# EAGLE board untitled (EAGLE 9.6.2)
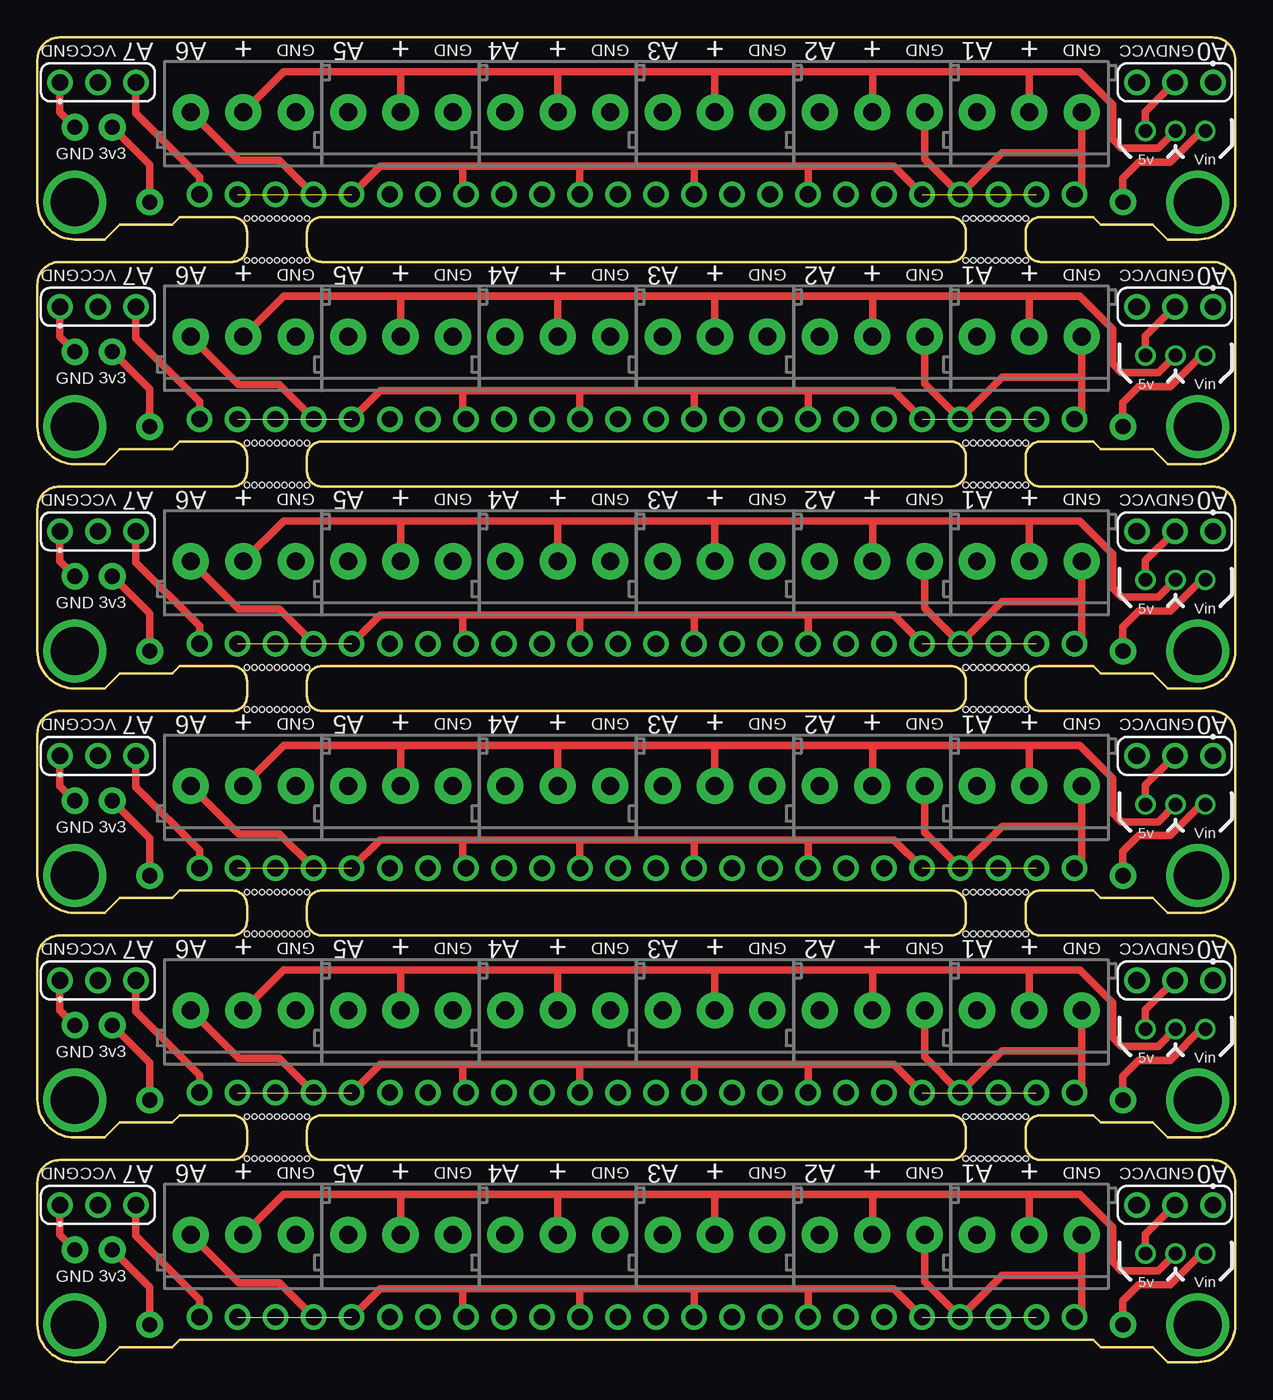
[diagram p0: board, top side]
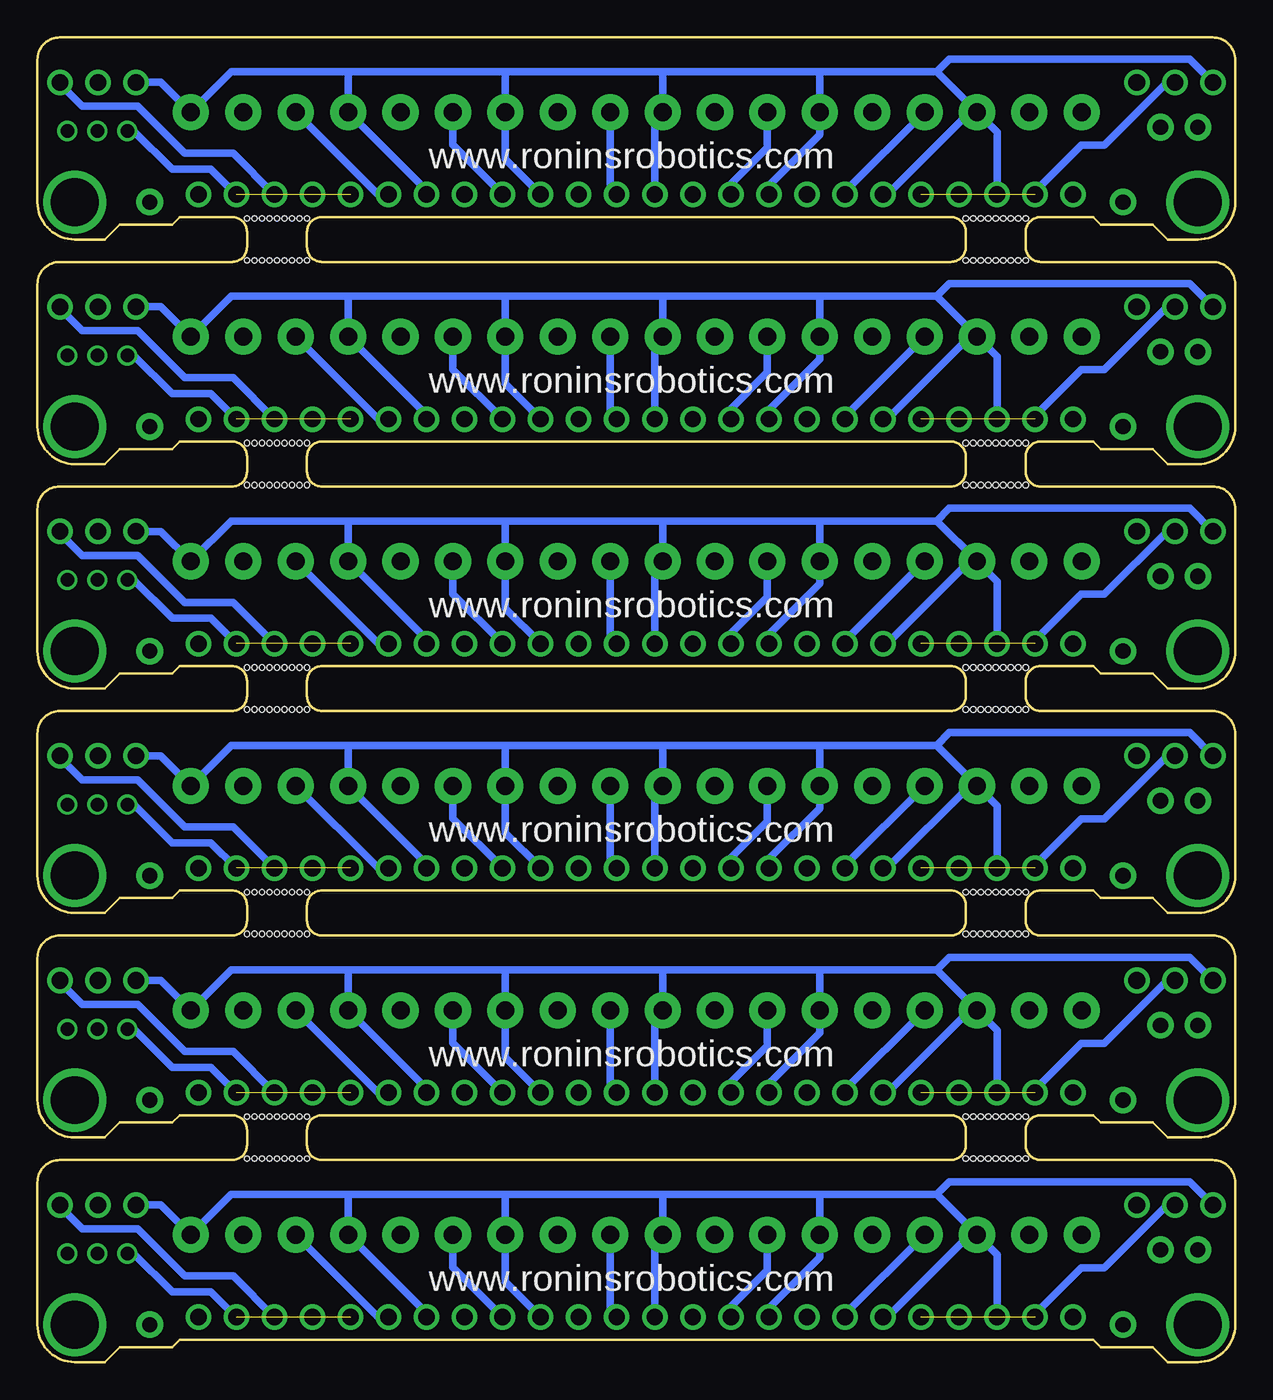
[diagram p1: board, bottom side, seen from below]

Size 80 x 88.5 mm. Coordinates in mm from the lower left corner, seen from the top.
Outline: 0,12 0,2.5 arc90 2.5,0 4.5,0 5.5,1 9,1 9.5,1.5 70.5,1.5 71,1 74.5,1 75.5,0 77.5,0 arc90 80,2.5 80,12 arc90 78.5,13.5 67,13.5 arc-90 66,14.5 66,15.5 arc-90 67,16.5 70.5,16.5 71,16 74.5,16 75.5,15 77.5,15 arc90 80,17.5 80,27 arc90 78.5,28.5 67,28.5 arc-90 66,29.5 66,30.5 arc-90 67,31.5 70.5,31.5 71,31 74.5,31 75.5,30 77.5,30 arc90 80,32.5 80,42 arc90 78.5,43.5 67,43.5 arc-90 66,44.5 66,45.5 arc-90 67,46.5 70.5,46.5 71,46 74.5,46 75.5,45 77.5,45 arc90 80,47.5 80,57 arc90 78.5,58.5 67,58.5 arc-90 66,59.5 66,60.5 arc-90 67,61.5 70.5,61.5 71,61 74.5,61 75.5,60 77.5,60 arc90 80,62.5 80,72 arc90 78.5,73.5 67,73.5 arc-90 66,74.5 66,75.5 arc-90 67,76.5 70.5,76.5 71,76 74.5,76 75.5,75 77.5,75 arc90 80,77.5 80,87 arc90 78.5,88.5 1.5,88.5 arc90 0,87 0,77.5 arc90 2.5,75 4.5,75 5.5,76 9,76 9.5,76.5 13,76.5 arc-90 14,75.5 14,74.5 arc-90 13,73.5 1.5,73.5 arc90 0,72 0,62.5 arc90 2.5,60 4.5,60 5.5,61 9,61 9.5,61.5 13,61.5 arc-90 14,60.5 14,59.5 arc-90 13,58.5 1.5,58.5 arc90 0,57 0,47.5 arc90 2.5,45 4.5,45 5.5,46 9,46 9.5,46.5 13,46.5 arc-90 14,45.5 14,44.5 arc-90 13,43.5 1.5,43.5 arc90 0,42 0,32.5 arc90 2.5,30 4.5,30 5.5,31 9,31 9.5,31.5 13,31.5 arc-90 14,30.5 14,29.5 arc-90 13,28.5 1.5,28.5 arc90 0,27 0,17.5 arc90 2.5,15 4.5,15 5.5,16 9,16 9.5,16.5 13,16.5 arc-90 14,15.5 14,14.5 arc-90 13,13.5 1.5,13.5 arc90 0,12
Outline: 19,16.5 arc90 18,15.5 18,14.5 arc90 19,13.5 61,13.5 arc90 62,14.5 62,15.5 arc90 61,16.5 19,16.5
Outline: 19,31.5 arc90 18,30.5 18,29.5 arc90 19,28.5 61,28.5 arc90 62,29.5 62,30.5 arc90 61,31.5 19,31.5
Outline: 19,61.5 arc90 18,60.5 18,59.5 arc90 19,58.5 61,58.5 arc90 62,59.5 62,60.5 arc90 61,61.5 19,61.5
Outline: 19,76.5 arc90 18,75.5 18,74.5 arc90 19,73.5 61,73.5 arc90 62,74.5 62,75.5 arc90 61,76.5 19,76.5
Outline: 19,46.5 arc90 18,45.5 18,44.5 arc90 19,43.5 61,43.5 arc90 62,44.5 62,45.5 arc90 61,46.5 19,46.5
Copper layers (1*16): Top 0.035mm / dielectric 1.6mm / Bottom 0.035mm
Design rules "Elecrow_2-layer_PCB_eagle_rule": minimum track width 6mil, minimum drill 12mil, track to track 6mil, track to pad 6mil, pad to pad 6mil, via to via 8mil, smd to smd 0mil, copper to edge 20mil, drill to drill 10mil, minimum pad ring 6mil, minimum via ring 6mil, stop-mask expansion 0mil, vias tented up to drill 100mil, thermal gap 10mil
Holes 0.35 mm at 14,16.4 14.5,16.4 15,16.4 15.5,16.4 16,16.4 16.5,16.4 17,16.4 17.5,16.4 18,16.4 14,13.6 14.5,13.6 15,13.6 15.5,13.6 16,13.6 16.5,13.6 17,13.6 17.5,13.6 18,13.6 62,16.4 62.5,16.4 63,16.4 63.5,16.4 64,16.4 64.5,16.4 65,16.4 65.5,16.4 66,16.4 62,13.6 62.5,13.6 63,13.6 63.5,13.6 64,13.6 64.5,13.6 65,13.6 65.5,13.6 66,13.6 14,31.4 14.5,31.4 15,31.4 15.5,31.4 16,31.4 16.5,31.4 17,31.4 17.5,31.4 18,31.4 14,28.6 14.5,28.6 15,28.6 15.5,28.6 16,28.6 16.5,28.6 17,28.6 17.5,28.6 18,28.6 62,31.4 62.5,31.4 63,31.4 63.5,31.4 64,31.4 64.5,31.4 65,31.4 65.5,31.4 66,31.4 62,28.6 62.5,28.6 63,28.6 63.5,28.6 64,28.6 64.5,28.6 65,28.6 65.5,28.6 66,28.6 14,61.4 14.5,61.4 15,61.4 15.5,61.4 16,61.4 16.5,61.4 17,61.4 17.5,61.4 18,61.4 14,58.6 14.5,58.6 15,58.6 15.5,58.6 16,58.6 16.5,58.6 17,58.6 17.5,58.6 18,58.6 62,61.4 62.5,61.4 63,61.4 63.5,61.4 64,61.4 64.5,61.4 65,61.4 65.5,61.4 66,61.4 62,58.6 62.5,58.6 63,58.6 63.5,58.6 64,58.6 64.5,58.6 65,58.6 65.5,58.6 66,58.6 14,76.4 14.5,76.4 15,76.4 15.5,76.4 16,76.4 16.5,76.4 17,76.4 17.5,76.4 18,76.4 14,73.6 14.5,73.6 15,73.6 15.5,73.6 16,73.6 16.5,73.6 17,73.6 17.5,73.6 18,73.6 62,76.4 62.5,76.4 63,76.4 63.5,76.4 64,76.4 64.5,76.4 65,76.4 65.5,76.4 66,76.4 62,73.6 62.5,73.6 63,73.6 63.5,73.6 64,73.6 64.5,73.6 65,73.6 65.5,73.6 66,73.6 14,46.4 14.5,46.4 15,46.4 15.5,46.4 16,46.4 16.5,46.4 17,46.4 17.5,46.4 18,46.4 14,43.6 14.5,43.6 15,43.6 15.5,43.6 16,43.6 16.5,43.6 17,43.6 17.5,43.6 18,43.6 62,46.4 62.5,46.4 63,46.4 63.5,46.4 64,46.4 64.5,46.4 65,46.4 65.5,46.4 66,46.4 62,43.6 62.5,43.6 63,43.6 63.5,43.6 64,43.6 64.5,43.6 65,43.6 65.5,43.6 66,43.6

## Footprints (pad centres in the part's own frame; a part is rotated, then mirrored left to right if it is on the bottom)
SCREWTERMINAL-3.5MM-3-NS = drill 1.2 pad 2.413: 1 0,0; 2 3.5,0; 3 7,0
1X01-CLEANBIG = drill 1.016 pad 1.778: 1 0,0
HDRVR3W64P254_1X3_762X240X800B = drill 1.105 pad 1.705: 1 0,0; 2 2.54,0; 3 5.08,0
1X3_2MM = drill 0.9 pad 1.32: P$1 0,0; P$2 2,0; P$3 4,0
1X24DFR = drill 1.092 pad 1.702: P$1 0,0; P$2 2.54,0; P$3 5.08,0; P$4 7.62,0; P$5 10.16,0; P$6 12.7,0; P$7 15.24,0; P$8 17.78,0; P$9 20.32,0; P$10 22.86,0; P$11 25.4,0; P$12 27.94,0; P$13 30.48,0; P$14 33.02,0; P$15 35.56,0; P$16 38.1,0; P$17 40.64,0; P$18 43.18,0; P$19 45.72,0; P$20 48.26,0; P$21 50.8,0; P$22 53.34,0; P$23 55.88,0; P$24 58.42,0

## Placement (x,y rotation side)
J1  [SCREWTERMINAL-3.5MM-3-NS]  10.25,23.5 0 top
J2  [SCREWTERMINAL-3.5MM-3-NS]  20.75,23.5 0 top
J3  [SCREWTERMINAL-3.5MM-3-NS]  31.25,23.5 0 top
J4  [SCREWTERMINAL-3.5MM-3-NS]  41.75,23.5 0 top
J5  [SCREWTERMINAL-3.5MM-3-NS]  52.25,23.5 0 top
J6  [SCREWTERMINAL-3.5MM-3-NS]  10.25,8.5 0 top
J7  [SCREWTERMINAL-3.5MM-3-NS]  20.75,8.5 0 top
J8  [SCREWTERMINAL-3.5MM-3-NS]  31.25,8.5 0 top
J9  [SCREWTERMINAL-3.5MM-3-NS]  41.75,8.5 0 top
J10  [SCREWTERMINAL-3.5MM-3-NS]  52.25,8.5 0 top
J11  [SCREWTERMINAL-3.5MM-3-NS]  62.75,8.5 0 top
J12  [SCREWTERMINAL-3.5MM-3-NS]  62.75,23.5 0 top
J13  [SCREWTERMINAL-3.5MM-3-NS]  10.25,38.5 0 top
J14  [SCREWTERMINAL-3.5MM-3-NS]  20.75,38.5 0 top
J15  [SCREWTERMINAL-3.5MM-3-NS]  31.25,38.5 0 top
J16  [SCREWTERMINAL-3.5MM-3-NS]  41.75,38.5 0 top
J17  [SCREWTERMINAL-3.5MM-3-NS]  52.25,38.5 0 top
J18  [SCREWTERMINAL-3.5MM-3-NS]  62.75,38.5 0 top
J19  [SCREWTERMINAL-3.5MM-3-NS]  10.25,53.5 0 top
J20  [SCREWTERMINAL-3.5MM-3-NS]  20.75,53.5 0 top
J21  [SCREWTERMINAL-3.5MM-3-NS]  31.25,53.5 0 top
J22  [SCREWTERMINAL-3.5MM-3-NS]  41.75,53.5 0 top
J23  [SCREWTERMINAL-3.5MM-3-NS]  52.25,53.5 0 top
J24  [SCREWTERMINAL-3.5MM-3-NS]  62.75,53.5 0 top
J25  [SCREWTERMINAL-3.5MM-3-NS]  10.25,68.5 0 top
J26  [SCREWTERMINAL-3.5MM-3-NS]  20.75,68.5 0 top
J27  [SCREWTERMINAL-3.5MM-3-NS]  31.25,68.5 0 top
J28  [SCREWTERMINAL-3.5MM-3-NS]  41.75,68.5 0 top
J29  [SCREWTERMINAL-3.5MM-3-NS]  52.25,68.5 0 top
J30  [SCREWTERMINAL-3.5MM-3-NS]  62.75,68.5 0 top
J31  [SCREWTERMINAL-3.5MM-3-NS]  10.25,83.5 0 top
J32  [SCREWTERMINAL-3.5MM-3-NS]  20.75,83.5 0 top
J33  [SCREWTERMINAL-3.5MM-3-NS]  31.25,83.5 0 top
J34  [SCREWTERMINAL-3.5MM-3-NS]  41.75,83.5 0 top
J35  [SCREWTERMINAL-3.5MM-3-NS]  52.25,83.5 0 top
J36  [SCREWTERMINAL-3.5MM-3-NS]  62.75,83.5 0 top
JP1  [1X01-CLEANBIG]  2.5,7.5 0 top
JP2  [1X01-CLEANBIG]  5,7.5 0 top
JP3  [1X01-CLEANBIG]  72.5,2.5 0 top
JP4  [1X01-CLEANBIG]  7.5,2.5 0 top
JP5  [1X01-CLEANBIG]  72.5,17.5 0 top
JP6  [1X01-CLEANBIG]  7.5,17.5 0 top
JP7  [1X01-CLEANBIG]  2.5,22.5 0 top
JP8  [1X01-CLEANBIG]  5,22.5 0 top
JP9  [1X01-CLEANBIG]  72.5,32.5 0 top
JP10  [1X01-CLEANBIG]  7.5,32.5 0 top
JP11  [1X01-CLEANBIG]  2.5,37.5 0 top
JP12  [1X01-CLEANBIG]  5,37.5 0 top
JP13  [1X01-CLEANBIG]  72.5,47.5 0 top
JP14  [1X01-CLEANBIG]  7.5,47.5 0 top
JP15  [1X01-CLEANBIG]  2.5,52.5 0 top
JP16  [1X01-CLEANBIG]  5,52.5 0 top
JP17  [1X01-CLEANBIG]  72.5,62.5 0 top
JP18  [1X01-CLEANBIG]  7.5,62.5 0 top
JP19  [1X01-CLEANBIG]  2.5,67.5 0 top
JP20  [1X01-CLEANBIG]  5,67.5 0 top
JP21  [1X01-CLEANBIG]  72.5,77.5 0 top
JP22  [1X01-CLEANBIG]  7.5,77.5 0 top
JP23  [1X01-CLEANBIG]  2.5,82.5 0 top
JP24  [1X01-CLEANBIG]  5,82.5 0 top
U$1  FML_1X3  [HDRVR3W64P254_1X3_762X240X800B]  1.5,25.5 0 top
U$2  FML_1X3  [HDRVR3W64P254_1X3_762X240X800B]  78.5,25.5 180 top
U$3  FML_1X32MM  [1X3_2MM]  78,22.25 180 top
U$4  1X24DFR  [1X24DFR]  69.25,18 180 top
U$5  FML_1X3  [HDRVR3W64P254_1X3_762X240X800B]  1.5,40.5 0 top
U$6  FML_1X3  [HDRVR3W64P254_1X3_762X240X800B]  78.5,40.5 180 top
U$7  FML_1X32MM  [1X3_2MM]  78,37.25 180 top
U$8  1X24DFR  [1X24DFR]  69.25,33 180 top
U$9  FML_1X3  [HDRVR3W64P254_1X3_762X240X800B]  1.5,55.5 0 top
U$10  FML_1X3  [HDRVR3W64P254_1X3_762X240X800B]  78.5,55.5 180 top
U$11  FML_1X32MM  [1X3_2MM]  78,52.25 180 top
U$12  1X24DFR  [1X24DFR]  69.25,48 180 top
U$13  FML_1X3  [HDRVR3W64P254_1X3_762X240X800B]  1.5,70.5 0 top
U$14  FML_1X3  [HDRVR3W64P254_1X3_762X240X800B]  78.5,70.5 180 top
U$15  FML_1X32MM  [1X3_2MM]  78,67.25 180 top
U$16  1X24DFR  [1X24DFR]  69.25,63 180 top
U$17  FML_1X3  [HDRVR3W64P254_1X3_762X240X800B]  1.5,85.5 0 top
U$18  FML_1X3  [HDRVR3W64P254_1X3_762X240X800B]  78.5,85.5 180 top
U$19  FML_1X32MM  [1X3_2MM]  78,82.25 180 top
U$20  1X24DFR  [1X24DFR]  69.25,78 180 top
U$28  FML_1X3  [HDRVR3W64P254_1X3_762X240X800B]  1.5,10.5 0 top
U$29  FML_1X3  [HDRVR3W64P254_1X3_762X240X800B]  78.5,10.5 180 top
U$30  FML_1X32MM  [1X3_2MM]  78,7.25 180 top
U$31  1X24DFR  [1X24DFR]  69.25,3 180 top

## Library data of the parts
J1-J36 = SparkFun-Connectors
JP1-JP24 = adafruit
U$1-U$20 U$28-U$31 = header_3d

## Nets
GND: J6.3 J7.3 J8.3 J9.3 J10.3 J11.3 JP1.1 U$28.1 U$29.3 U$31.P$1 U$31.P$4 U$31.P$7 U$31.P$10 U$31.P$13 U$31.P$16 U$31.P$19 U$31.P$22
GND1: J1.3 J2.3 J3.3 J4.3 J5.3 J12.3 JP7.1 U$1.1 U$2.3 U$4.P$1 U$4.P$4 U$4.P$7 U$4.P$10 U$4.P$13 U$4.P$16 U$4.P$19 U$4.P$22
GND2: J13.3 J14.3 J15.3 J16.3 J17.3 J18.3 JP11.1 U$5.1 U$6.3 U$8.P$1 U$8.P$4 U$8.P$7 U$8.P$10 U$8.P$13 U$8.P$16 U$8.P$19 U$8.P$22
GND3: J19.3 J20.3 J21.3 J22.3 J23.3 J24.3 JP15.1 U$9.1 U$10.3 U$12.P$1 U$12.P$4 U$12.P$7 U$12.P$10 U$12.P$13 U$12.P$16 U$12.P$19 U$12.P$22
GND4: J25.3 J26.3 J27.3 J28.3 J29.3 J30.3 JP19.1 U$13.1 U$14.3 U$16.P$1 U$16.P$4 U$16.P$7 U$16.P$10 U$16.P$13 U$16.P$16 U$16.P$19 U$16.P$22
GND5: J31.3 J32.3 J33.3 J34.3 J35.3 J36.3 JP23.1 U$17.1 U$18.3 U$20.P$1 U$20.P$4 U$20.P$7 U$20.P$10 U$20.P$13 U$20.P$16 U$20.P$19 U$20.P$22
S$1: U$28.3 U$31.P$24
S$2: U$29.1 U$31.P$3
S$3: J6.1 U$31.P$21
S$4: J7.1 U$31.P$18
S$5: J8.1 U$31.P$15
S$6: J9.1 U$31.P$12
S$7: J10.1 U$31.P$9
S$8: J11.1 U$31.P$6
S$9: JP2.1 JP4.1
S$10: U$1.3 U$4.P$24
S$11: U$2.1 U$4.P$3
S$12: J1.1 U$4.P$21
S$13: J2.1 U$4.P$18
S$14: J3.1 U$4.P$15
S$15: J4.1 U$4.P$12
S$16: J5.1 U$4.P$9
S$17: J12.1 U$4.P$6
S$18: JP6.1 JP8.1
S$19: U$5.3 U$8.P$24
S$20: U$6.1 U$8.P$3
S$21: J13.1 U$8.P$21
S$22: J14.1 U$8.P$18
S$23: J15.1 U$8.P$15
S$24: J16.1 U$8.P$12
S$25: J17.1 U$8.P$9
S$26: J18.1 U$8.P$6
S$27: JP10.1 JP12.1
S$28: U$9.3 U$12.P$24
S$29: U$10.1 U$12.P$3
S$30: J19.1 U$12.P$21
S$31: J20.1 U$12.P$18
S$32: J21.1 U$12.P$15
S$33: J22.1 U$12.P$12
S$34: J23.1 U$12.P$9
S$35: J24.1 U$12.P$6
S$36: JP14.1 JP16.1
S$37: U$13.3 U$16.P$24
S$38: U$14.1 U$16.P$3
S$39: J25.1 U$16.P$21
S$40: J26.1 U$16.P$18
S$41: J27.1 U$16.P$15
S$42: J28.1 U$16.P$12
S$43: J29.1 U$16.P$9
S$44: J30.1 U$16.P$6
S$45: JP18.1 JP20.1
S$46: U$17.3 U$20.P$24
S$47: U$18.1 U$20.P$3
S$48: J31.1 U$20.P$21
S$49: J32.1 U$20.P$18
S$50: J33.1 U$20.P$15
S$51: J34.1 U$20.P$12
S$52: J35.1 U$20.P$9
S$53: J36.1 U$20.P$6
S$54: JP22.1 JP24.1
V+: J6.2 J7.2 J8.2 J9.2 J10.2 J11.2 U$30.P$2
V+1: J1.2 J2.2 J3.2 J4.2 J5.2 J12.2 U$3.P$2
V+2: J13.2 J14.2 J15.2 J16.2 J17.2 J18.2 U$7.P$2
V+3: J19.2 J20.2 J21.2 J22.2 J23.2 J24.2 U$11.P$2
V+4: J25.2 J26.2 J27.2 J28.2 J29.2 J30.2 U$15.P$2
V+5: J31.2 J32.2 J33.2 J34.2 J35.2 J36.2 U$19.P$2
VCC: U$28.2 U$29.2 U$30.P$3 U$31.P$2 U$31.P$5 U$31.P$8 U$31.P$11 U$31.P$14 U$31.P$17 U$31.P$20 U$31.P$23
VCC1: U$1.2 U$2.2 U$3.P$3 U$4.P$2 U$4.P$5 U$4.P$8 U$4.P$11 U$4.P$14 U$4.P$17 U$4.P$20 U$4.P$23
VCC2: U$5.2 U$6.2 U$7.P$3 U$8.P$2 U$8.P$5 U$8.P$8 U$8.P$11 U$8.P$14 U$8.P$17 U$8.P$20 U$8.P$23
VCC3: U$9.2 U$10.2 U$11.P$3 U$12.P$2 U$12.P$5 U$12.P$8 U$12.P$11 U$12.P$14 U$12.P$17 U$12.P$20 U$12.P$23
VCC4: U$13.2 U$14.2 U$15.P$3 U$16.P$2 U$16.P$5 U$16.P$8 U$16.P$11 U$16.P$14 U$16.P$17 U$16.P$20 U$16.P$23
VCC5: U$17.2 U$18.2 U$19.P$3 U$20.P$2 U$20.P$5 U$20.P$8 U$20.P$11 U$20.P$14 U$20.P$17 U$20.P$20 U$20.P$23
VIN: JP3.1 U$30.P$1
VIN1: JP5.1 U$3.P$1
VIN2: JP9.1 U$7.P$1
VIN3: JP13.1 U$11.P$1
VIN4: JP17.1 U$15.P$1
VIN5: JP21.1 U$19.P$1

## Tracks (layer width: path | path; a pad name or v marks a point on that pad's centre or on a via)
GND
  Top 0.508: J11.3 69.75,5.8 | 69.75,5.8 69.75,3.5 U$31.P$1 | 69.75,5.8 64.43,5.8 U$31.P$4 59.25,5.38 J10.3 | JP1.1 1.5,8.5 U$28.1
  Bottom 0.508: U$29.3 71.75,10.5 J11.3 67.05,11.2 59.4,11.2 | 19.95,11.2 J6.3 | 59.4,11.2 48.8,11.2 | 48.8,11.2 38.4,11.2 | 38.4,11.2 27.85,11.2 | 27.85,11.2 19.95,11.2 | U$28.1 3.05,12.05 19.1,12.05 19.95,11.2 | J6.3 15.91,7.16 U$31.P$22 | 27.85,11.2 27.75,11.1 J7.3 27.75,7 31.15,3.6 U$31.P$16 | 38.4,11.2 38.25,11.05 J8.3 38.77,7.98 U$31.P$13 | 48.8,11.2 48.75,11.15 J9.3 48.75,5.36 U$31.P$10 | 59.4,11.2 59.25,11.05 J10.3 54.01,3.26 U$31.P$7 | U$31.P$19 23.23,3 17.73,8.5 J6.3
GND1
  Top 0.508: J12.3 69.75,20.8 | 69.75,20.8 69.75,18.5 U$4.P$1 | 69.75,20.8 64.43,20.8 U$4.P$4 59.25,20.38 J5.3 | JP7.1 1.5,23.5 U$1.1
  Bottom 0.508: U$2.3 71.75,25.5 J12.3 67.05,26.2 59.4,26.2 | 19.95,26.2 J1.3 | 59.4,26.2 48.8,26.2 | 48.8,26.2 38.4,26.2 | 38.4,26.2 27.85,26.2 | 27.85,26.2 19.95,26.2 | U$1.1 3.05,27.05 19.1,27.05 19.95,26.2 | J1.3 15.91,22.16 U$4.P$22 | 27.85,26.2 27.75,26.1 J2.3 27.75,22 31.15,18.6 U$4.P$16 | 38.4,26.2 38.25,26.05 J3.3 38.77,22.98 U$4.P$13 | 48.8,26.2 48.75,26.15 J4.3 48.75,20.36 U$4.P$10 | 59.4,26.2 59.25,26.05 J5.3 54.01,18.26 U$4.P$7 | U$4.P$19 23.23,18 17.73,23.5 J1.3
GND2
  Top 0.508: J18.3 69.75,35.8 | 69.75,35.8 69.75,33.5 U$8.P$1 | 69.75,35.8 64.43,35.8 U$8.P$4 59.25,35.38 J17.3 | JP11.1 1.5,38.5 U$5.1
  Bottom 0.508: U$6.3 71.75,40.5 J18.3 67.05,41.2 59.4,41.2 | 19.95,41.2 J13.3 | 59.4,41.2 48.8,41.2 | 48.8,41.2 38.4,41.2 | 38.4,41.2 27.85,41.2 | 27.85,41.2 19.95,41.2 | U$5.1 3.05,42.05 19.1,42.05 19.95,41.2 | J13.3 15.91,37.16 U$8.P$22 | 27.85,41.2 27.75,41.1 J14.3 27.75,37 31.15,33.6 U$8.P$16 | 38.4,41.2 38.25,41.05 J15.3 38.77,37.98 U$8.P$13 | 48.8,41.2 48.75,41.15 J16.3 48.75,35.36 U$8.P$10 | 59.4,41.2 59.25,41.05 J17.3 54.01,33.26 U$8.P$7 | U$8.P$19 23.23,33 17.73,38.5 J13.3
GND3
  Top 0.508: J24.3 69.75,50.8 | 69.75,50.8 69.75,48.5 U$12.P$1 | 69.75,50.8 64.43,50.8 U$12.P$4 59.25,50.38 J23.3 | JP15.1 1.5,53.5 U$9.1
  Bottom 0.508: U$10.3 71.75,55.5 J24.3 67.05,56.2 59.4,56.2 | 19.95,56.2 J19.3 | 59.4,56.2 48.8,56.2 | 48.8,56.2 38.4,56.2 | 38.4,56.2 27.85,56.2 | 27.85,56.2 19.95,56.2 | U$9.1 3.05,57.05 19.1,57.05 19.95,56.2 | J19.3 15.91,52.16 U$12.P$22 | 27.85,56.2 27.75,56.1 J20.3 27.75,52 31.15,48.6 U$12.P$16 | 38.4,56.2 38.25,56.05 J21.3 38.77,52.98 U$12.P$13 | 48.8,56.2 48.75,56.15 J22.3 48.75,50.36 U$12.P$10 | 59.4,56.2 59.25,56.05 J23.3 54.01,48.26 U$12.P$7 | U$12.P$19 23.23,48 17.73,53.5 J19.3
GND4
  Top 0.508: J30.3 69.75,65.8 | 69.75,65.8 69.75,63.5 U$16.P$1 | 69.75,65.8 64.43,65.8 U$16.P$4 59.25,65.38 J29.3 | JP19.1 1.5,68.5 U$13.1
  Bottom 0.508: U$14.3 71.75,70.5 J30.3 67.05,71.2 59.4,71.2 | 19.95,71.2 J25.3 | 59.4,71.2 48.8,71.2 | 48.8,71.2 38.4,71.2 | 38.4,71.2 27.85,71.2 | 27.85,71.2 19.95,71.2 | U$13.1 3.05,72.05 19.1,72.05 19.95,71.2 | J25.3 15.91,67.16 U$16.P$22 | 27.85,71.2 27.75,71.1 J26.3 27.75,67 31.15,63.6 U$16.P$16 | 38.4,71.2 38.25,71.05 J27.3 38.77,67.98 U$16.P$13 | 48.8,71.2 48.75,71.15 J28.3 48.75,65.36 U$16.P$10 | 59.4,71.2 59.25,71.05 J29.3 54.01,63.26 U$16.P$7 | U$16.P$19 23.23,63 17.73,68.5 J25.3
GND5
  Top 0.508: J36.3 69.75,80.8 | 69.75,80.8 69.75,78.5 U$20.P$1 | 69.75,80.8 64.43,80.8 U$20.P$4 59.25,80.38 J35.3 | JP23.1 1.5,83.5 U$17.1
  Bottom 0.508: U$18.3 71.75,85.5 J36.3 67.05,86.2 59.4,86.2 | 19.95,86.2 J31.3 | 59.4,86.2 48.8,86.2 | 48.8,86.2 38.4,86.2 | 38.4,86.2 27.85,86.2 | 27.85,86.2 19.95,86.2 | U$17.1 3.05,87.05 19.1,87.05 19.95,86.2 | J31.3 15.91,82.16 U$20.P$22 | 27.85,86.2 27.75,86.1 J32.3 27.75,82 31.15,78.6 U$20.P$16 | 38.4,86.2 38.25,86.05 J33.3 38.77,82.98 U$20.P$13 | 48.8,86.2 48.75,86.15 J34.3 48.75,80.36 U$20.P$10 | 59.4,86.2 59.25,86.05 J35.3 54.01,78.26 U$20.P$7 | U$20.P$19 23.23,78 17.73,83.5 J31.3
N$1  (via drill 3.2)
  other vias: 77.5,17.5
N$2  (via drill 3.2)
  other vias: 2.5,17.5
N$3  (via drill 3.2)
  other vias: 77.5,32.5
N$4  (via drill 3.2)
  other vias: 2.5,32.5
N$5  (via drill 3.2)
  other vias: 77.5,47.5
N$6  (via drill 3.2)
  other vias: 2.5,47.5
N$7  (via drill 3.2)
  other vias: 77.5,62.5
N$8  (via drill 3.2)
  other vias: 2.5,62.5
N$9  (via drill 3.2)
  other vias: 77.5,77.5
N$10  (via drill 3.2)
  other vias: 2.5,77.5
N$19  (via drill 3.2)
  other vias: 77.5,2.5
N$23  (via drill 3.2)
  other vias: 2.5,2.5
S$1
  Top 0.508: U$31.P$24 10.83,4.17 6.58,8.42 U$28.3
S$2
  Bottom 0.508: U$31.P$3 66.93,5.76 70.16,5.76 73.3,8.9 77,8.9 78.5,10.4 U$29.1
S$3
  Top 0.508: J6.1 13.45,5.3 16.15,5.3 U$31.P$21
S$4
  Bottom 0.508: J7.1 26.07,3.18 U$31.P$18
S$5
  Bottom 0.508: J8.1 31.25,6.12 33.69,3.68 U$31.P$15
S$6
  Bottom 0.508: J9.1 41.75,3.44 U$31.P$12
S$7
  Bottom 0.508: J10.1 52.25,6.32 U$31.P$9
S$8
  Bottom 0.508: J11.1 57.25,3 U$31.P$6
S$9
  Top 0.508: JP2.1 7.5,5 JP4.1
S$10
  Top 0.508: U$4.P$24 10.83,19.17 6.58,23.42 U$1.3
S$11
  Bottom 0.508: U$4.P$3 66.93,20.76 70.16,20.76 73.3,23.9 77,23.9 78.5,25.4 U$2.1
S$12
  Top 0.508: J1.1 13.45,20.3 16.15,20.3 U$4.P$21
S$13
  Bottom 0.508: J2.1 26.07,18.18 U$4.P$18
S$14
  Bottom 0.508: J3.1 31.25,21.12 33.69,18.68 U$4.P$15
S$15
  Bottom 0.508: J4.1 41.75,18.44 U$4.P$12
S$16
  Bottom 0.508: J5.1 52.25,21.32 U$4.P$9
S$17
  Bottom 0.508: J12.1 57.25,18 U$4.P$6
S$18
  Top 0.508: JP8.1 7.5,20 JP6.1
S$19
  Top 0.508: U$8.P$24 10.83,34.17 6.58,38.42 U$5.3
S$20
  Bottom 0.508: U$8.P$3 66.93,35.76 70.16,35.76 73.3,38.9 77,38.9 78.5,40.4 U$6.1
S$21
  Top 0.508: J13.1 13.45,35.3 16.15,35.3 U$8.P$21
S$22
  Bottom 0.508: J14.1 26.07,33.18 U$8.P$18
S$23
  Bottom 0.508: J15.1 31.25,36.12 33.69,33.68 U$8.P$15
S$24
  Bottom 0.508: J16.1 41.75,33.44 U$8.P$12
S$25
  Bottom 0.508: J17.1 52.25,36.32 U$8.P$9
S$26
  Bottom 0.508: J18.1 57.25,33 U$8.P$6
S$27
  Top 0.508: JP12.1 7.5,35 JP10.1
S$28
  Top 0.508: U$12.P$24 10.83,49.17 6.58,53.42 U$9.3
S$29
  Bottom 0.508: U$12.P$3 66.93,50.76 70.16,50.76 73.3,53.9 77,53.9 78.5,55.4 U$10.1
S$30
  Top 0.508: J19.1 13.45,50.3 16.15,50.3 U$12.P$21
S$31
  Bottom 0.508: J20.1 26.07,48.18 U$12.P$18
S$32
  Bottom 0.508: J21.1 31.25,51.12 33.69,48.68 U$12.P$15
S$33
  Bottom 0.508: J22.1 41.75,48.44 U$12.P$12
S$34
  Bottom 0.508: J23.1 52.25,51.32 U$12.P$9
S$35
  Bottom 0.508: J24.1 57.25,48 U$12.P$6
S$36
  Top 0.508: JP16.1 7.5,50 JP14.1
S$37
  Top 0.508: U$16.P$24 10.83,64.17 6.58,68.42 U$13.3
S$38
  Bottom 0.508: U$16.P$3 66.93,65.76 70.16,65.76 73.3,68.9 77,68.9 78.5,70.4 U$14.1
S$39
  Top 0.508: J25.1 13.45,65.3 16.15,65.3 U$16.P$21
S$40
  Bottom 0.508: J26.1 26.07,63.18 U$16.P$18
S$41
  Bottom 0.508: J27.1 31.25,66.12 33.69,63.68 U$16.P$15
S$42
  Bottom 0.508: J28.1 41.75,63.44 U$16.P$12
S$43
  Bottom 0.508: J29.1 52.25,66.32 U$16.P$9
S$44
  Bottom 0.508: J30.1 57.25,63 U$16.P$6
S$45
  Top 0.508: JP20.1 7.5,65 JP18.1
S$46
  Top 0.508: U$20.P$24 10.83,79.17 6.58,83.42 U$17.3
S$47
  Bottom 0.508: U$20.P$3 66.93,80.76 70.16,80.76 73.3,83.9 77,83.9 78.5,85.4 U$18.1
S$48
  Top 0.508: J31.1 13.45,80.3 16.15,80.3 U$20.P$21
S$49
  Bottom 0.508: J32.1 26.07,78.18 U$20.P$18
S$50
  Bottom 0.508: J33.1 31.25,81.12 33.69,78.68 U$20.P$15
S$51
  Bottom 0.508: J34.1 41.75,78.44 U$20.P$12
S$52
  Bottom 0.508: J35.1 52.25,81.32 U$20.P$9
S$53
  Bottom 0.508: J36.1 57.25,78 U$20.P$6
S$54
  Top 0.508: JP24.1 7.5,80 JP22.1
V+
  Top 0.508: J6.2 16.45,11.2 24.3,11.2 | 66.25,11.2 J11.2 66.25,10.85 | 24.3,11.2 34.7,11.2 | 34.7,11.2 45.3,11.2 | 45.3,11.2 55.8,11.2 | 55.8,11.2 66.25,11.2 | J10.2 55.8,8.55 55.8,11.2 | J9.2 45.25,11.15 45.3,11.2 | J8.2 34.75,11.15 34.7,11.2 | J7.2 24.25,11.15 24.3,11.2 | 66.25,11.2 69.6,11.2 71.8,9 71.8,6.7 72.4,6.1 74.85,6.1 U$30.P$2
V+1
  Top 0.508: J1.2 16.45,26.2 24.3,26.2 | 66.25,26.2 J12.2 66.25,25.85 | 24.3,26.2 34.7,26.2 | 34.7,26.2 45.3,26.2 | 45.3,26.2 55.8,26.2 | 55.8,26.2 66.25,26.2 | J5.2 55.8,23.55 55.8,26.2 | J4.2 45.25,26.15 45.3,26.2 | J3.2 34.75,26.15 34.7,26.2 | J2.2 24.25,26.15 24.3,26.2 | 66.25,26.2 69.6,26.2 71.8,24 71.8,21.7 72.4,21.1 74.85,21.1 U$3.P$2
V+2
  Top 0.508: J13.2 16.45,41.2 24.3,41.2 | 66.25,41.2 J18.2 66.25,40.85 | 24.3,41.2 34.7,41.2 | 34.7,41.2 45.3,41.2 | 45.3,41.2 55.8,41.2 | 55.8,41.2 66.25,41.2 | J17.2 55.8,38.55 55.8,41.2 | J16.2 45.25,41.15 45.3,41.2 | J15.2 34.75,41.15 34.7,41.2 | J14.2 24.25,41.15 24.3,41.2 | 66.25,41.2 69.6,41.2 71.8,39 71.8,36.7 72.4,36.1 74.85,36.1 U$7.P$2
V+3
  Top 0.508: J19.2 16.45,56.2 24.3,56.2 | 66.25,56.2 J24.2 66.25,55.85 | 24.3,56.2 34.7,56.2 | 34.7,56.2 45.3,56.2 | 45.3,56.2 55.8,56.2 | 55.8,56.2 66.25,56.2 | J23.2 55.8,53.55 55.8,56.2 | J22.2 45.25,56.15 45.3,56.2 | J21.2 34.75,56.15 34.7,56.2 | J20.2 24.25,56.15 24.3,56.2 | 66.25,56.2 69.6,56.2 71.8,54 71.8,51.7 72.4,51.1 74.85,51.1 U$11.P$2
V+4
  Top 0.508: J25.2 16.45,71.2 24.3,71.2 | 66.25,71.2 J30.2 66.25,70.85 | 24.3,71.2 34.7,71.2 | 34.7,71.2 45.3,71.2 | 45.3,71.2 55.8,71.2 | 55.8,71.2 66.25,71.2 | J29.2 55.8,68.55 55.8,71.2 | J28.2 45.25,71.15 45.3,71.2 | J27.2 34.75,71.15 34.7,71.2 | J26.2 24.25,71.15 24.3,71.2 | 66.25,71.2 69.6,71.2 71.8,69 71.8,66.7 72.4,66.1 74.85,66.1 U$15.P$2
V+5
  Top 0.508: J31.2 16.45,86.2 24.3,86.2 | 66.25,86.2 J36.2 66.25,85.85 | 24.3,86.2 34.7,86.2 | 34.7,86.2 45.3,86.2 | 45.3,86.2 55.8,86.2 | 55.8,86.2 66.25,86.2 | J35.2 55.8,83.55 55.8,86.2 | J34.2 45.25,86.15 45.3,86.2 | J33.2 34.75,86.15 34.7,86.2 | J32.2 24.25,86.15 24.3,86.2 | 66.25,86.2 69.6,86.2 71.8,84 71.8,81.7 72.4,81.1 74.85,81.1 U$19.P$2
VCC  (2 unrouted)
  Top 0.508: U$29.2 74,8.54 U$30.P$3 | U$31.P$5 57.19,4.9 51.4,4.9 | U$31.P$20 22.89,4.9 28.4,4.9 | 51.4,4.9 43.8,4.9 | 43.8,4.9 36.2,4.9 | 36.2,4.9 28.4,4.9 | U$31.P$17 28.4,3.21 28.4,4.9 | U$31.P$14 36.23,4.87 36.2,4.9 | U$31.P$11 43.85,4.85 43.8,4.9 | U$31.P$8 51.47,4.83 51.4,4.9
  Bottom 0.508: U$30.P$3 73.56,7.25 71.01,4.7 68.41,4.7 U$31.P$2 | U$28.2 4.54,10.5 8.74,6.3 10.3,6.3 13.37,3.23 U$31.P$23
VCC1  (2 unrouted)
  Top 0.508: U$2.2 74,23.54 U$3.P$3 | U$4.P$5 57.19,19.9 51.4,19.9 | U$4.P$20 22.89,19.9 28.4,19.9 | 51.4,19.9 43.8,19.9 | 43.8,19.9 36.2,19.9 | 36.2,19.9 28.4,19.9 | U$4.P$17 28.4,18.21 28.4,19.9 | U$4.P$14 36.23,19.87 36.2,19.9 | U$4.P$11 43.85,19.85 43.8,19.9 | U$4.P$8 51.47,19.83 51.4,19.9
  Bottom 0.508: U$3.P$3 73.56,22.25 71.01,19.7 68.41,19.7 U$4.P$2 | U$1.2 4.54,25.5 8.74,21.3 10.3,21.3 13.37,18.23 U$4.P$23
VCC2  (2 unrouted)
  Top 0.508: U$6.2 74,38.54 U$7.P$3 | U$8.P$5 57.19,34.9 51.4,34.9 | U$8.P$20 22.89,34.9 28.4,34.9 | 51.4,34.9 43.8,34.9 | 43.8,34.9 36.2,34.9 | 36.2,34.9 28.4,34.9 | U$8.P$17 28.4,33.21 28.4,34.9 | U$8.P$14 36.23,34.87 36.2,34.9 | U$8.P$11 43.85,34.85 43.8,34.9 | U$8.P$8 51.47,34.83 51.4,34.9
  Bottom 0.508: U$7.P$3 73.56,37.25 71.01,34.7 68.41,34.7 U$8.P$2 | U$5.2 4.54,40.5 8.74,36.3 10.3,36.3 13.37,33.23 U$8.P$23
VCC3  (2 unrouted)
  Top 0.508: U$10.2 74,53.54 U$11.P$3 | U$12.P$5 57.19,49.9 51.4,49.9 | U$12.P$20 22.89,49.9 28.4,49.9 | 51.4,49.9 43.8,49.9 | 43.8,49.9 36.2,49.9 | 36.2,49.9 28.4,49.9 | U$12.P$17 28.4,48.21 28.4,49.9 | U$12.P$14 36.23,49.87 36.2,49.9 | U$12.P$11 43.85,49.85 43.8,49.9 | U$12.P$8 51.47,49.83 51.4,49.9
  Bottom 0.508: U$11.P$3 73.56,52.25 71.01,49.7 68.41,49.7 U$12.P$2 | U$9.2 4.54,55.5 8.74,51.3 10.3,51.3 13.37,48.23 U$12.P$23
VCC4  (2 unrouted)
  Top 0.508: U$14.2 74,68.54 U$15.P$3 | U$16.P$5 57.19,64.9 51.4,64.9 | U$16.P$20 22.89,64.9 28.4,64.9 | 51.4,64.9 43.8,64.9 | 43.8,64.9 36.2,64.9 | 36.2,64.9 28.4,64.9 | U$16.P$17 28.4,63.21 28.4,64.9 | U$16.P$14 36.23,64.87 36.2,64.9 | U$16.P$11 43.85,64.85 43.8,64.9 | U$16.P$8 51.47,64.83 51.4,64.9
  Bottom 0.508: U$15.P$3 73.56,67.25 71.01,64.7 68.41,64.7 U$16.P$2 | U$13.2 4.54,70.5 8.74,66.3 10.3,66.3 13.37,63.23 U$16.P$23
VCC5  (2 unrouted)
  Top 0.508: U$18.2 74,83.54 U$19.P$3 | U$20.P$5 57.19,79.9 51.4,79.9 | U$20.P$20 22.89,79.9 28.4,79.9 | 51.4,79.9 43.8,79.9 | 43.8,79.9 36.2,79.9 | 36.2,79.9 28.4,79.9 | U$20.P$17 28.4,78.21 28.4,79.9 | U$20.P$14 36.23,79.87 36.2,79.9 | U$20.P$11 43.85,79.85 43.8,79.9 | U$20.P$8 51.47,79.83 51.4,79.9
  Bottom 0.508: U$19.P$3 73.56,82.25 71.01,79.7 68.41,79.7 U$20.P$2 | U$17.2 4.54,85.5 8.74,81.3 10.3,81.3 13.37,78.23 U$20.P$23
VIN
  Top 0.508: JP3.1 72.5,4.1 73.57,5.17 75.65,5.17 77.73,7.25 U$30.P$1
VIN1
  Top 0.508: JP5.1 72.5,19.1 73.57,20.17 75.65,20.17 77.73,22.25 U$3.P$1
VIN2
  Top 0.508: JP9.1 72.5,34.1 73.57,35.17 75.65,35.17 77.73,37.25 U$7.P$1
VIN3
  Top 0.508: JP13.1 72.5,49.1 73.57,50.17 75.65,50.17 77.73,52.25 U$11.P$1
VIN4
  Top 0.508: JP17.1 72.5,64.1 73.57,65.17 75.65,65.17 77.73,67.25 U$15.P$1
VIN5
  Top 0.508: JP21.1 72.5,79.1 73.57,80.17 75.65,80.17 77.73,82.25 U$19.P$1

## Text on the board
tPlace: GND | VCC | A7 | A6 | + | GND | A5 | + | GND | A4 | + | GND | A3 | + | GND | A2 | + | GND | A1 | + | GND | VCC | GND | A0 | GND | 3v3 | 5v | Vin | GND | VCC | A7 | A6 | + | GND | A5 | + | GND | A4 | + | GND | A3 | + | GND | A2 | + | GND | A1 | + | GND | VCC | GND | A0 | GND | 3v3 | 5v | Vin | GND | VCC | A7 | A6 | + | GND | A5 | + | GND | A4 | + | GND | A3 | + | GND | A2 | + | GND | A1 | + | GND | VCC | GND | A0 | GND | 3v3 | 5v | Vin | GND | VCC | A7 | A6 | + | GND | A5 | + | GND | A4 | + | GND | A3 | + | GND | A2 | + | GND | A1 | + | GND | VCC | GND | A0 | GND | 3v3 | 5v | Vin | GND | VCC | A7 | A6 | + | GND | A5 | + | GND | A4 | + | GND | A3 | + | GND | A2 | + | GND | A1 | + | GND | VCC | GND | A0 | GND | 3v3 | 5v | Vin | GND | VCC | A7 | A6 | + | GND | A5 | + | GND | A4 | + | GND | A3 | + | GND | A2 | + | GND | A1 | + | GND | VCC | GND | A0 | GND | 3v3 | 5v | Vin
bPlace: www.roninsrobotics.com | www.roninsrobotics.com | www.roninsrobotics.com | www.roninsrobotics.com | www.roninsrobotics.com | www.roninsrobotics.com